# Altium PCB PCB1.PcbDoc
Units mm, origin at the board's own origin, x right, y up, seen from the top; angles counter-clockwise.
Board outline 106 x 133 mm, 2 copper layers (Top Layer, Bottom Layer); 52 components, 74 nets, 280 pads, 0 vias.
Unrouted connection lines stored in the file: 131.
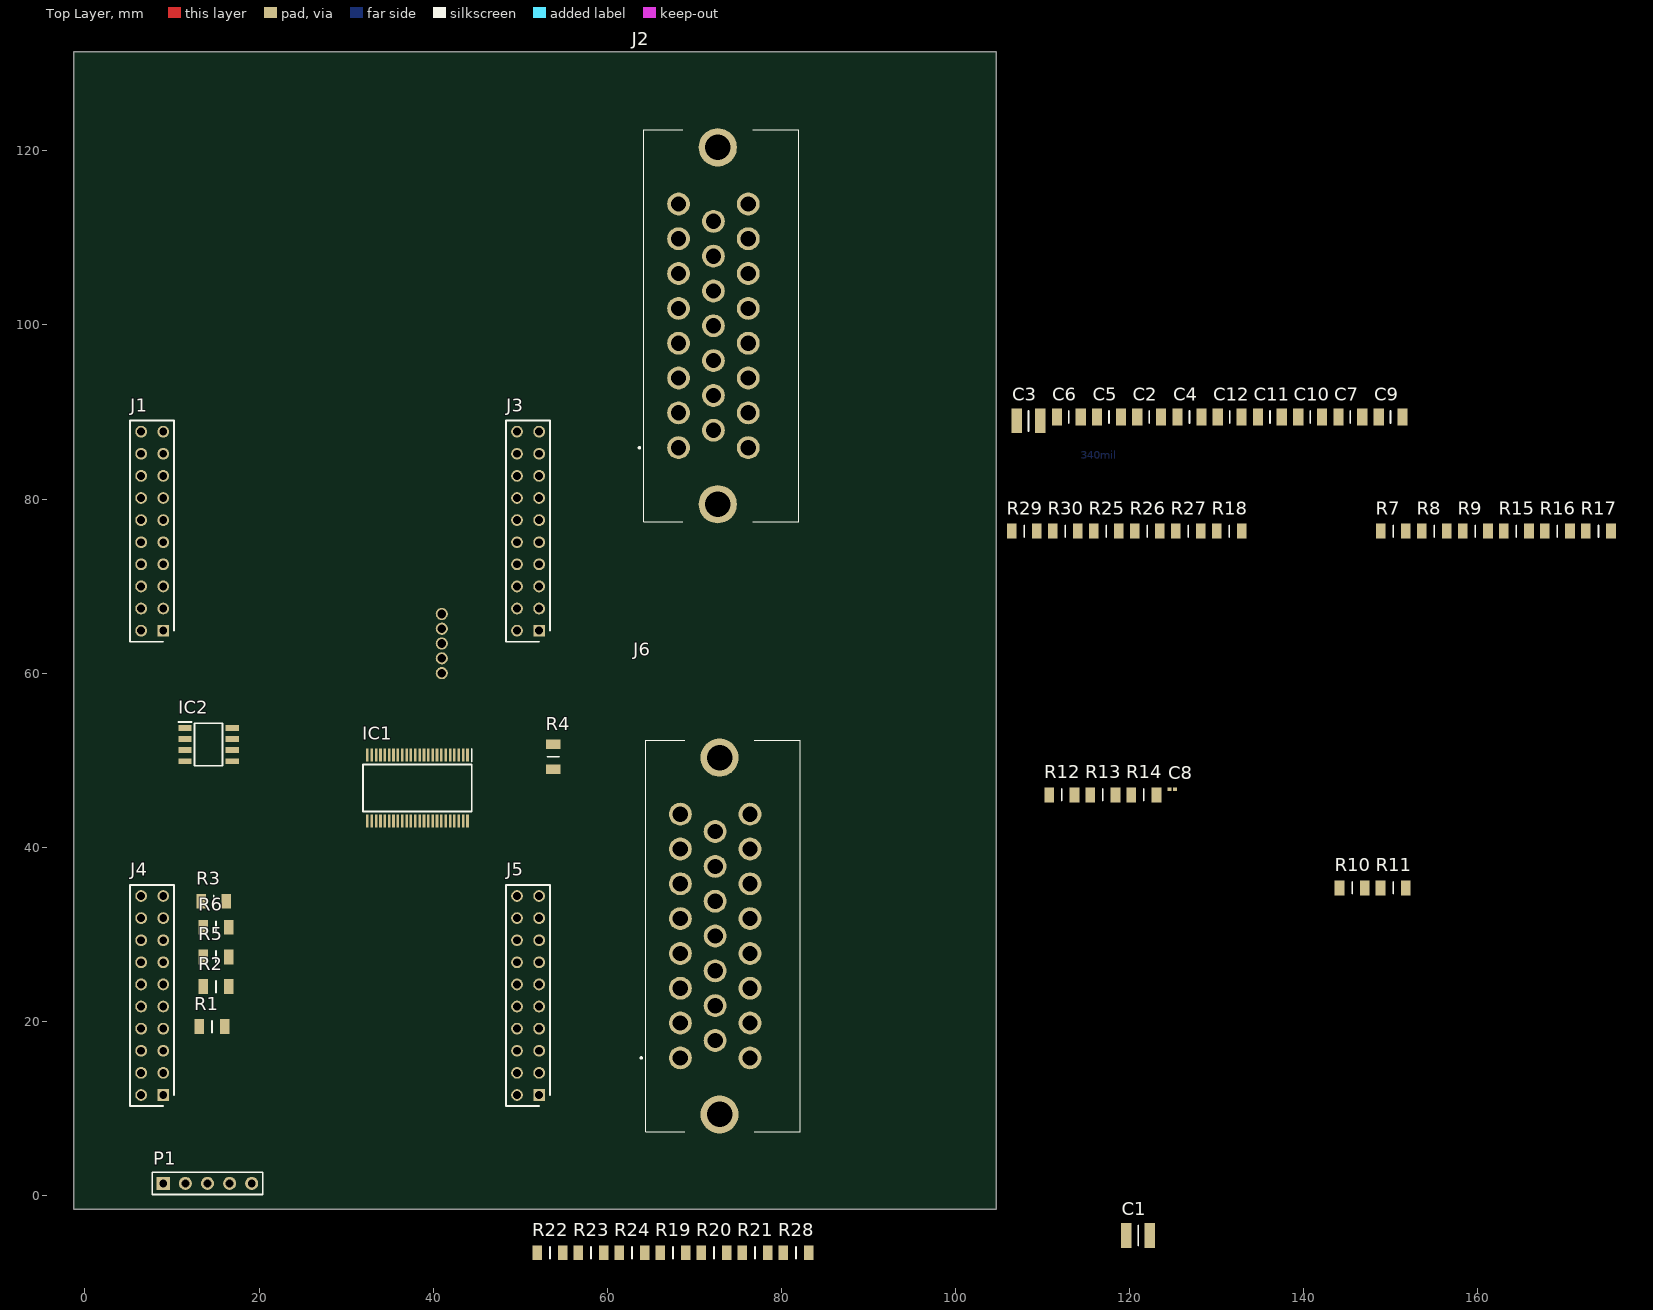
[diagram p0: Top Layer view]
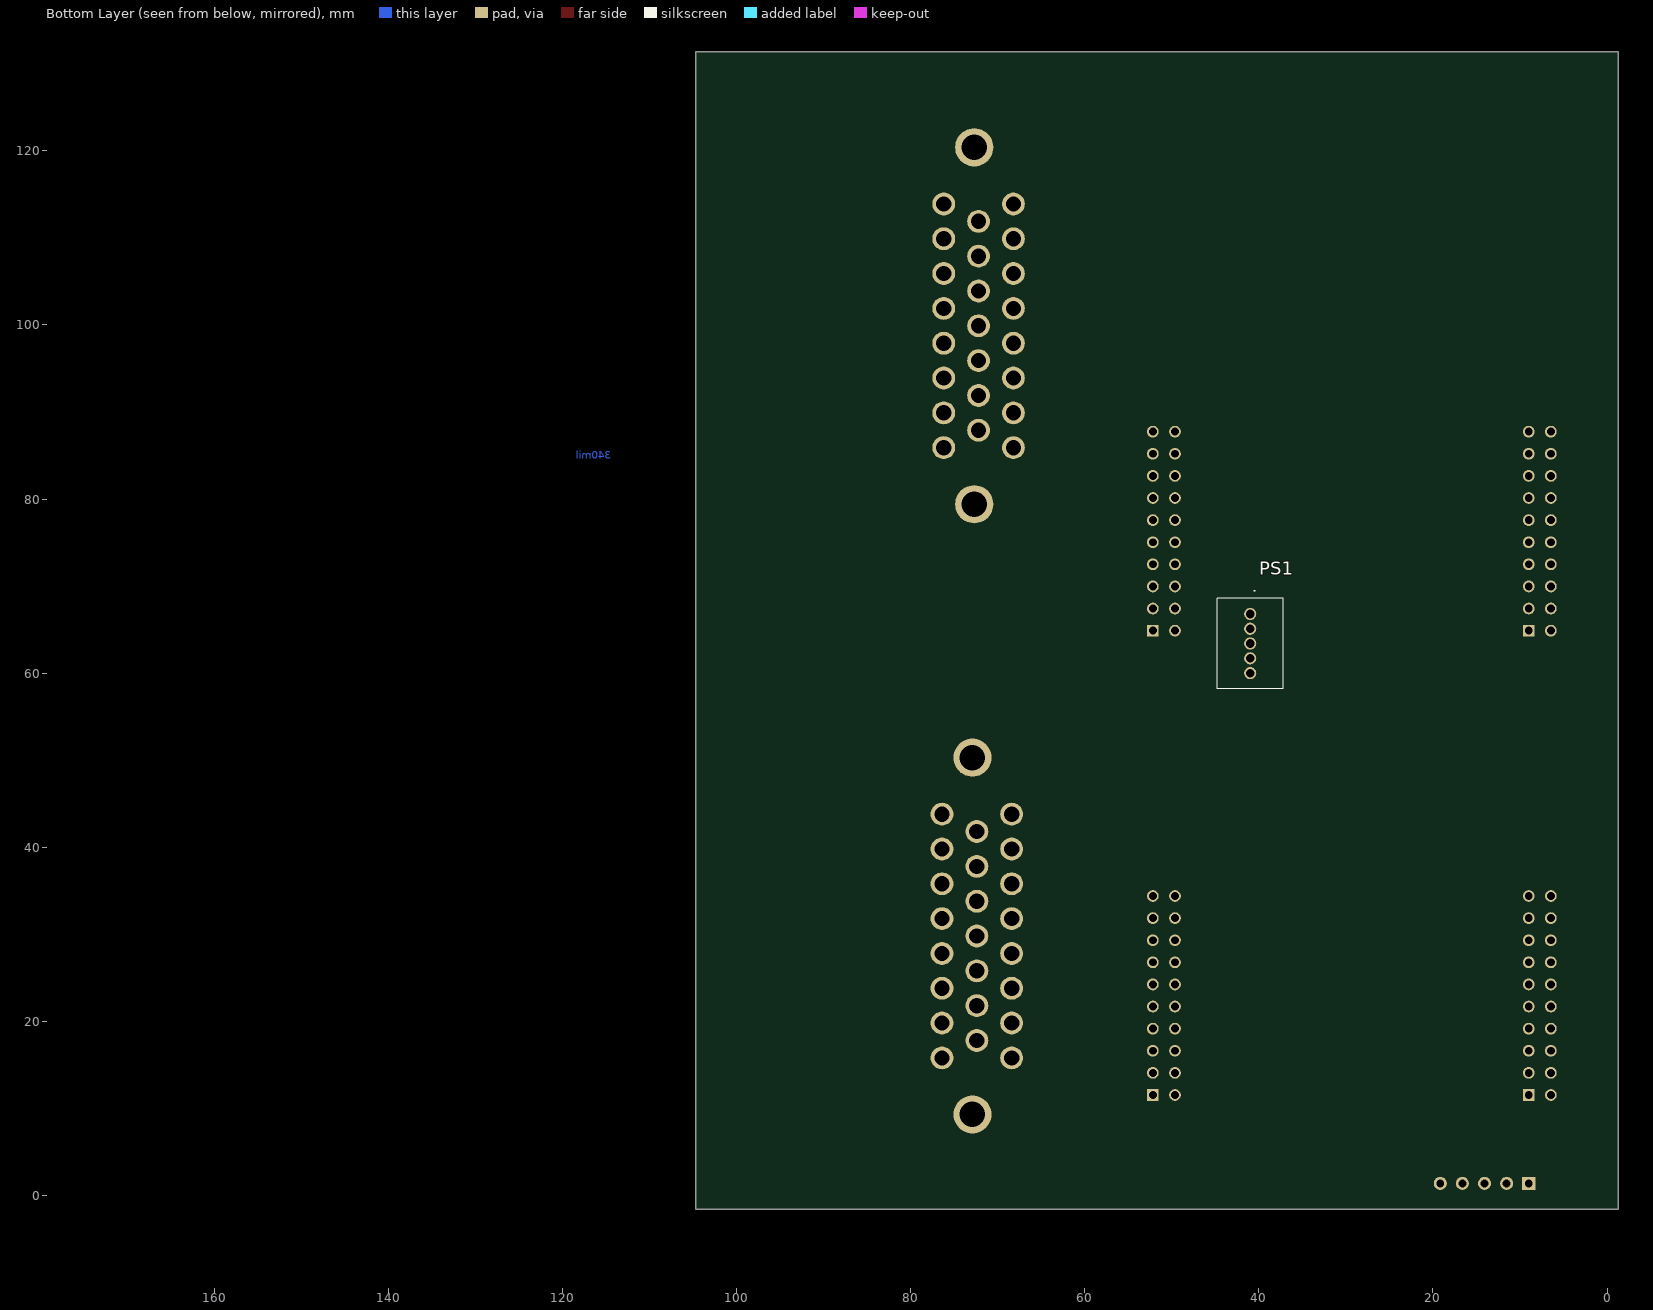
[diagram p1: Bottom Layer view, seen from below]

## Layer stack, top to bottom
Top Solder: solder mask 0.0102, Solder Resist, Dk 3.5
Top Layer: signal copper 0.0356
Dielectric 1: dielectric 0.32, FR-4, Dk 4.8
Bottom Layer: signal copper 0.0356
Bottom Solder: solder mask 0.0102, Solder Resist, Dk 3.5

## Board outline
-1.3,-1.6 104.7,-1.6 104.7,131.4 -1.3,131.4

## Design rules (kind name [scope] priority, off if disabled: settings)
Clearance [All] p1: gap=0.254 ignorepadtopadclearanceinfootprint=TRUE except(0: Arc-Hole Track-Hole SMDPad-Hole THPad-Hole Via-Hole Fill-Hole Poly-Hole Region-Hole Text-Hole; 0.203: Arc-Arc Arc-Track Arc-SMDPad Track-Track Track-SMDPad SMDPad-SMDPad)
PolygonConnect [All] p1: connectstyle=Relief reliefconductorwidth=0.254 reliefentries=4 polygonreliefangle="90 Angle" airgapwidth=0.254
RoomDefinition Sheet1 [InComponentClass('Sheet1')] p1: confinementstyle=ConfineIn formatcopy=TRUE lockcomponents=FALSE outline 250.3,-76.14 637.904,-76.14 637.904,-10.1 250.3,-10.1
RoutingVias [All] p1: holewidth=0.711 width=1.27 viastyle="Through Hole" minholewidth=0.711 minwidth=1.27 maxholewidth=0.711 maxwidth=1.27
SMDNeckDown [All] p1: percent=99.000
SolderMaskExpansion [All] p1: expansion=0.102
Width [All] p1: maxlimit=0.254 minlimit=0.254 preferedwidth=0.254
30 further rules are at their usual default settings.

## Classes and differential pairs
component class Sheet1: C2 C4 C5 C9 C11 IC2 J1 J3 J5 J6 P1 PS1 R1 R2 R3 R4 R5 R6 R7 R8 R9 R10 R11 R12 R13 R14 R15 R16 R17 R18 R19 R20 R21 R22 R23 R24 R25 R26 R27 R28 R29 R30

## Components (designator, comment, footprint, x,y, rotation, side; value= is the part's Value field where it differs from the comment)
C1 "C1210C107M4PAC7800" CAPC3225X280N 121,-4.6 r0 top
C2 "GMK316BJ106KL-T" CAPC3216X190N 122.264,89.422 r0 top
C3 "C1210C107M4PAC7800" CAPC3225X280N 108.401,88.972 r0 top
C4 "GMK316BJ106KL-T" CAPC3216X190N 126.886,89.422 r0 top
C5 "GMK316BJ106KL-T" CAPC3216X190N 117.643,89.422 r0 top
C6 "GMK316BJ106KL-T" CAPC3216X190N 113.022,89.422 r0 top
C7 "GMK316BJ106KL-T" CAPC3216X190N 145.37,89.422 r0 top
C8 "GRM0332C1E100JD01D" CAPC0603X33N 124.92,46.656 r0 top
C9 "GMK316BJ106KL-T" CAPC3216X190N 149.992,89.422 r0 top
C10 "GMK316BJ106KL-T" CAPC3216X190N 140.749,89.422 r0 top
C11 "GMK316BJ106KL-T" CAPC3216X190N 136.128,89.422 r0 top
C12 "GMK316BJ106KL-T" CAPC3216X190N 131.507,89.422 r0 top
IC1 "GTL2000DGG,118" SOP50P810X120-48N 38.2,46.8 r270 top
IC2 "MCP6022-E_SN" SOIC127P600X175-8N 14.2,51.8 r0 top
J1 "6-534206-0" 206-0 9,64.88 r90 top
J2 "776087-1" 7760871 68.2,85.9 r90 top
J3 "6-534206-0" 206-0_1 52.18,64.88 r90 top
J4 "6-534206-0" 206-0_2 9,11.54 r90 top
J5 "6-534206-0" 206-0_3 52.18,11.54 r90 top
J6 "776087-1" 7760871 68.4,15.8 r90 top
P1 "Header 5" HDR1X5 9,1.38 r0 top
PS1 "OKR-T_10-W12-C" OKRT10W12C 41,66.8 r90 bottom
R1 "6190" RESC3116X70N 14.6,19.4 r0 top
R2 "6190" RESC3116X70N 15.05,24 r0 top
R3 "6190" RESC3116X70N 14.8,33.8 r0 top
R4 "22000" RESC3116X70N 53.8,50.4 r270 top
R5 "6190" RESC3116X70N 15.05,27.4 r0 top
R6 "6190" RESC3116X70N 15.05,30.8 r0 top
R7 "9760" RESC3116X70N 150.305,76.324 r0 top
R8 "9760" RESC3116X70N 155.016,76.324 r0 top
R9 "9760" RESC3116X70N 159.728,76.324 r0 top
R10 "9760" RESC3116X70N 145.572,35.324 r0 top
R11 "9760" RESC3116X70N 150.283,35.324 r0 top
R12 "6800" RESC3116X70N 112.226,46.016 r0 top
R13 "200k" RESC3116X70N 116.937,46.016 r0 top
R14 "6800" RESC3116X70N 121.648,46.016 r0 top
R15 "9760" RESC3116X70N 164.439,76.324 r0 top
R16 "9760" RESC3116X70N 169.15,76.324 r0 top
R17 "9760" RESC3116X70N 173.861,76.324 r0 top
R18 "9760" RESC3116X70N 131.46,76.324 r0 top
R19 "9760" RESC3116X70N 67.56,-6.573 r0 top
R20 "432" RESC3116X70N 72.271,-6.573 r0 top
R21 "6190" RESC3116X70N 76.982,-6.573 r0 top
R22 "6190" RESC3116X70N 53.426,-6.573 r0 top
R23 "22000" RESC3116X70N 58.137,-6.573 r0 top
R24 "6190" RESC3116X70N 62.848,-6.573 r0 top
R25 "6190" RESC3116X70N 117.327,76.324 r0 top
R26 "6190" RESC3116X70N 122.038,76.324 r0 top
R27 "22000" RESC3116X70N 126.749,76.324 r0 top
R28 "22000" RESC3116X70N 81.693,-6.573 r0 top
R29 "22000" RESC3116X70N 107.904,76.324 r0 top
R30 "22000" RESC3116X70N 112.616,76.324 r0 top

## Footprints (in the part's own frame and the unit in brackets; to place one, negate y for a bottom-side part, rotate by r counter-clockwise, add the part's x,y. Pads: shape width x height; smd on the part's side, far side on the other; paste and mask are expansions set on the pad)
206-0 [mm]
  rect 1.35x1.35 hole 0.9: 1(0,0)
  round 1.35 hole 0.9: 2(2.54,0) 3(5.08,0) 4(7.62,0) 5(10.16,0) 6(12.7,0) 7(15.24,0) 8(17.78,0) 9(20.32,0) 10(22.86,0) 21(0,2.54) 22(2.54,2.54) 23(5.08,2.54) 24(7.62,2.54) 25(10.16,2.54) 26(12.7,2.54) 27(15.24,2.54) 28(17.78,2.54) 29(20.32,2.54) 30(22.86,2.54)
  silkscreen extent -1.27,-1.25 24.13,3.81, body extent -1.27,-1.24 24.13,3.78, height 8.64
206-0_1 [mm]
  round 1.35 hole 0.9: 11(22.86,2.54) 12(20.32,2.54) 13(17.78,2.54) 14(15.24,2.54) 15(12.7,2.54) 16(10.16,2.54) 17(7.62,2.54) 18(5.08,2.54) 19(2.54,2.54) 20(0,2.54) 31(22.86,0) 32(20.32,0) 33(17.78,0) 34(15.24,0) 35(12.7,0) 36(10.16,0) 37(7.62,0) 38(5.08,0) 39(2.54,0)
  rect 1.35x1.35 hole 0.9: 40(0,0)
  silkscreen extent -1.27,-1.25 24.13,3.81, body extent -1.27,-1.24 24.13,3.78, height 8.64
206-0_2 [mm]
  rect 1.35x1.35 hole 0.9: 41(0,0)
  round 1.35 hole 0.9: 42(2.54,0) 43(5.08,0) 44(7.62,0) 45(10.16,0) 46(12.7,0) 47(15.24,0) 48(17.78,0) 49(20.32,0) 50(22.86,0) 61(0,2.54) 62(2.54,2.54) 63(5.08,2.54) 64(7.62,2.54) 65(10.16,2.54) 66(12.7,2.54) 67(15.24,2.54) 68(17.78,2.54) 69(20.32,2.54) 70(22.86,2.54)
  silkscreen extent -1.27,-1.25 24.13,3.81, body extent -1.27,-1.24 24.13,3.78, height 0.05
206-0_3 [mm]
  round 1.35 hole 0.9: 51(22.86,2.54) 52(20.32,2.54) 53(17.78,2.54) 54(15.24,2.54) 55(12.7,2.54) 56(10.16,2.54) 57(7.62,2.54) 58(5.08,2.54) 59(2.54,2.54) 60(0,2.54) 71(22.86,0) 72(20.32,0) 73(17.78,0) 74(15.24,0) 75(12.7,0) 76(10.16,0) 77(7.62,0) 78(5.08,0) 79(2.54,0)
  rect 1.35x1.35 hole 0.9: 80(0,0)
  silkscreen extent -1.27,-1.25 24.13,3.81, body extent -1.27,-1.24 24.13,3.78, height 8.64
7760871 [mm]
  round 2.625 hole 1.75: 1(0,0) 2(4,0) 3(8,0) 4(12,0) 5(16,0) 6(20,0) 7(24,0) 8(28,0) 9(2,-4) 10(6,-4) 11(10,-4) 12(14,-4) 13(18,-4) 14(22,-4) 15(26,-4) 16(0,-8) 17(4,-8) 18(8,-8) 19(12,-8) 20(16,-8) 21(20,-8) 22(24,-8) 23(28,-8)
  round 4.395 hole 2.93: MH1(-6.5,-4.5) MH2(34.5,-4.5)
  silkscreen extent -8.5,-13.8 36.5,4.6, body extent -16.43,-35.77 44.37,2.03, height 27.99
CAPC0603X33N [mm]
  rect 0.46x0.42 smd: 1(-0.33,0) 2(0.33,0)
  body extent -0.3,-0.15 0.3,0.15, height 0.33
CAPC3216X190N [mm]
  rect 1.17x1.92 smd: 1(-1.37,0) 2(1.37,0)
  silkscreen extent 0,-0.7 0,0.7, body extent -1.6,-0.8 1.6,0.8, height 1.9
CAPC3225X280N [mm]
  rect 1.21x2.82 smd: 1(-1.35,0) 2(1.35,0)
  silkscreen extent 0,-1.15 0,1.15, body extent -1.6,-1.25 1.6,1.25, height 2.8
HDR1X5 [mm] "Connector; Header; 5 Position"
  rect 1.5x1.5 hole 0.9: 1(0,0)
  round 1.5 hole 0.9: 2(2.54,0) 3(5.08,0) 4(7.62,0) 5(10.16,0)
  silkscreen extent -1.27,-1.27 11.43,1.27
OKRT10W12C [mm]
  round 1.4 hole 1.006: 1(0,0) 2(-1.7,0) 3(-3.4,0) 4(-5.1,0) 5(-6.8,0)
  silkscreen extent -8.6,-3.82 2.7,3.8, body extent -8.6,-3.82 1.8,3.8, height 16.55
RESC3116X70N [mm]
  rect 1.1x1.7 smd: 1(-1.45,0) 2(1.45,0)
  silkscreen extent 0,-0.67 0,0.67, body extent -1.56,-0.77 1.56,0.77, height 0.7
SOIC127P600X175-8N [mm]
  rect 1.525x0.65 smd: 1(-2.712,1.905) 2(-2.712,0.635) 3(-2.712,-0.635) 4(-2.712,-1.905) 5(2.712,-1.905) 6(2.712,-0.635) 7(2.712,0.635) 8(2.712,1.905)
  silkscreen extent -3.47,-2.45 1.6,2.58, body extent -3,-2.45 3,2.45, height 1.75
SOP50P810X120-48N [mm]
  rect 1.475x0.3 smd: 1(-3.788,5.75) 2(-3.788,5.25) 3(-3.788,4.75) 4(-3.788,4.25) 5(-3.788,3.75) 6(-3.788,3.25) 7(-3.788,2.75) 8(-3.788,2.25) 9(-3.788,1.75) 10(-3.788,1.25) 11(-3.788,0.75) 12(-3.788,0.25) 13(-3.788,-0.25) 14(-3.788,-0.75) 15(-3.788,-1.25) 16(-3.788,-1.75) 17(-3.788,-2.25) 18(-3.788,-2.75) 19(-3.788,-3.25) 20(-3.788,-3.75) 21(-3.788,-4.25) 22(-3.788,-4.75) 23(-3.788,-5.25) 24(-3.788,-5.75) 25(3.788,-5.75) 26(3.788,-5.25) 27(3.788,-4.75) 28(3.788,-4.25) 29(3.788,-3.75) 30(3.788,-3.25) 31(3.788,-2.75) 32(3.788,-2.25) 33(3.788,-1.75) 34(3.788,-1.25) 35(3.788,-0.75) 36(3.788,-0.25) 37(3.788,0.25) 38(3.788,0.75) 39(3.788,1.25) 40(3.788,1.75) 41(3.788,2.25) 42(3.788,2.75) 43(3.788,3.25) 44(3.788,3.75) 45(3.788,4.25) 46(3.788,4.75) 47(3.788,5.25) 48(3.788,5.75)
  silkscreen extent -4.52,-6.25 2.7,6.25, body extent -4.05,-6.25 4.05,6.25, height 1.2

## Part data
C1 C3: "Capacitor", Manufacturer_Name=Kemet, Mouser Part Number=N/A, Datasheet Link=https://content.kemet.com/datasheets/KEM_C1006_X5R_SMD.pdf, Height=2.8mm, Manufacturer_Part_Number=C1210C107M4PAC7800, Mouser Price/Stock=https://www.mouser.com/Search/Refine.aspx?Keyword=N%2FA
C2 C4 C5 C6 C7 C9 C10 C11 C12: "Capacitor", Manufacturer_Name="TAIYO YUDEN", Mouser Part Number=963-GMK316BJ106KL-T, Datasheet Link=https://www.yuden.co.jp/productdata/catalog/en/mlcc_all_e.pdf, Height=1.9mm, Manufacturer_Part_Number=GMK316BJ106KL-T, Mouser Price/Stock=http://www.mouser.com/Search/ProductDetail.aspx?qs=I6KAKw0tg2wzwIZ%2fJjJ5Xg%3d%3d
C8: "Capacitor", Manufacturer_Name="Murata Electronics", Mouser Part Number=81-GRM0332C1E100JD01, Datasheet Link=http://www.murata.com/~/media/webrenewal/support/library/catalog/products/capacitor/mlcc/c02e.pdf, Height=0.33mm, Manufacturer_Part_Number=GRM0332C1E100JD01D, Mouser Price/Stock=https://www.mouser.com/Search/Refine.aspx?Keyword=81-GRM0332C1E100JD01
IC1: "Integrated Circuit", Manufacturer_Name=Nexperia, Mouser Part Number=771-GTL2000DGG118, Datasheet Link=https://www.nxp.com/docs/en/data-sheet/GTL2000.pdf, Height=1.2mm, Manufacturer_Part_Number=GTL2000DGG,118, Mouser Price/Stock=https://www.mouser.com/Search/Refine.aspx?Keyword=771-GTL2000DGG118
IC2: "Integrated Circuit", Manufacturer_Name=Microchip, Manufacturer_Part_Number=MCP6022-E/SN, Mouser Part Number=579-MCP6022-E/SN, RS Part Number=2508396144, Allied_Number=70046166, Allied Price/Stock=http://www.alliedelec.com/microchip-technology-inc-mcp6022-e-sn/70046166/, Datasheet Link=http://ww1.microchip.com/downloads/en/DeviceDoc/21685d.pdf, Height=1.75mm, Mouser Price/Stock=https://www.mouser.com/Search/Refine.aspx?Keyword=579-MCP6022-E%2FSN, RS Price/Stock=http://uk.rs-online.com/web/p/products/2508396144
J1: "Connector", Manufacturer_Name="TE Connectivity", Mouser Part Number=571-6-534206-0, RS Part Number=6803445P, Allied_Number=70042958, Allied Price/Stock=https://www.alliedelec.com/teconnectivity-6-534206-0/70042958/, Datasheet Link=https://www.te.com/commerce/DocumentDelivery/DDEController?Action=showdoc&DocId=Customer+Drawing%7F534206%7FR7%7Fpdf%7FEnglish%7FENG_CD_534206_R7.pdf%7F6-534206-0, Height=8.64mm, Manufacturer_Part_Number=6-534206-0, Mouser Price/Stock=https://www.mouser.com/Search/Refine.aspx?Keyword=571-6-534206-0, RS Price/Stock=http://uk.rs-online.com/web/p/products/6803445P
J2 J6: "Connector", Manufacturer_Name="TE Connectivity", Mouser Part Number=571-776087-1, RS Part Number=7181471P, Allied_Number=70288175, Allied Price/Stock=https://www.alliedelec.com/te-connectivity-776087-1/70288175/, Datasheet Link=https://componentsearchengine.com/Datasheets/1/776087-1.pdf, Height=32.1mm, Manufacturer_Part_Number=776087-1, Mouser Price/Stock=https://www.mouser.com/Search/Refine.aspx?Keyword=571-776087-1, RS Price/Stock=http://uk.rs-online.com/web/p/products/7181471P
J3: library part 6-534206-0_1, "Connector", Manufacturer_Name="TE Connectivity", Mouser Part Number=571-6-534206-0, RS Part Number=6803445P, Allied_Number=70042958, Allied Price/Stock=https://www.alliedelec.com/teconnectivity-6-534206-0/70042958/, Datasheet Link=https://www.te.com/commerce/DocumentDelivery/DDEController?Action=showdoc&DocId=Customer+Drawing%7F534206%7FR7%7Fpdf%7FEnglish%7FENG_CD_534206_R7.pdf%7F6-534206-0, Height=8.64mm, Manufacturer_Part_Number=6-534206-0, Mouser Price/Stock=https://www.mouser.com/Search/Refine.aspx?Keyword=571-6-534206-0, RS Price/Stock=http://uk.rs-online.com/web/p/products/6803445P
J4: library part 6-534206-0_2, "Connector", Manufacturer_Name="TE Connectivity", Mouser Part Number=571-6-534206-0, RS Part Number=6803445P, Allied_Number=70042958, Allied Price/Stock=https://www.alliedelec.com/teconnectivity-6-534206-0/70042958/, Datasheet Link=https://www.te.com/commerce/DocumentDelivery/DDEController?Action=showdoc&DocId=Customer+Drawing%7F534206%7FR7%7Fpdf%7FEnglish%7FENG_CD_534206_R7.pdf%7F6-534206-0, Height=8.64mm, Manufacturer_Part_Number=6-534206-0, Mouser Price/Stock=https://www.mouser.com/Search/Refine.aspx?Keyword=571-6-534206-0, RS Price/Stock=http://uk.rs-online.com/web/p/products/6803445P
J5: library part 6-534206-0_3, "Connector", Manufacturer_Name="TE Connectivity", Mouser Part Number=571-6-534206-0, RS Part Number=6803445P, Allied_Number=70042958, Allied Price/Stock=https://www.alliedelec.com/teconnectivity-6-534206-0/70042958/, Datasheet Link=https://www.te.com/commerce/DocumentDelivery/DDEController?Action=showdoc&DocId=Customer+Drawing%7F534206%7FR7%7Fpdf%7FEnglish%7FENG_CD_534206_R7.pdf%7F6-534206-0, Height=8.64mm, Manufacturer_Part_Number=6-534206-0, Mouser Price/Stock=https://www.mouser.com/Search/Refine.aspx?Keyword=571-6-534206-0, RS Price/Stock=http://uk.rs-online.com/web/p/products/6803445P
P1: "Header, 5-Pin", LatestRevisionDate=17-Jul-2002, LatestRevisionNote="Re-released for DXP Platform.", Publisher="Altium Limited"
PS1: "Power Supply", Manufacturer_Name="Murata Electronics", Manufacturer_Part_Number=OKR-T/10-W12-C, Mouser Part Number=580-OKR-T/10-W12-C, RS Part Number=1736947P, Datasheet Link=https://componentsearchengine.com/Datasheets/2/OKR-T_10-W12-C.pdf, Height=16.55mm, Mouser Price/Stock=https://www.mouser.com/Search/Refine.aspx?Keyword=580-OKR-T%2F10-W12-C, RS Price/Stock=http://uk.rs-online.com/web/p/products/1736947P
R1 R2 R3 R5 R6 R21 R22 R24 R25 R26: library part ERJ-8ENF1000V, "Resistor", Manufacturer_Name=Panasonic, Manufacturer_Part_Number=ERJ-8ENF6191V, Mouser Part Number=667-ERJ-8ENF6191V, Allied_Number=70266166, Allied Price/Stock=https://www.alliedelec.com/panasonic-erj-8enf1000v/70266166/, Datasheet Link=https://industrial.panasonic.com/cdbs/www-data/pdf/RDA0000/AOA0000C86.pdf, Height=0.7mm, Mouser Price/Stock=https://www.mouser.com/Search/Refine.aspx?Keyword=667-ERJ-8ENF1000V
R4 R23 R27 R28 R29 R30: library part ERJ-8ENF1000V, "Resistor", Manufacturer_Name=Panasonic, Manufacturer_Part_Number=ERJ-8ENF2201V, Mouser Part Number=667-ERJ-8ENF2201V, Allied_Number=70266166, Allied Price/Stock=https://www.alliedelec.com/panasonic-erj-8enf1000v/70266166/, Datasheet Link=https://industrial.panasonic.com/cdbs/www-data/pdf/RDA0000/AOA0000C86.pdf, Height=0.7mm, Mouser Price/Stock=https://www.mouser.com/Search/Refine.aspx?Keyword=667-ERJ-8ENF1000V
R7 R8 R9 R10 R11 R15 R16 R17 R18 R19: library part ERJ-8ENF1000V, "Resistor", Manufacturer_Name=Panasonic, Manufacturer_Part_Number=ERJ-8ENF9761V, Mouser Part Number=667-ERJ-8ENF9761V, Allied_Number=70266166, Allied Price/Stock=https://www.alliedelec.com/panasonic-erj-8enf1000v/70266166/, Datasheet Link=https://industrial.panasonic.com/cdbs/www-data/pdf/RDA0000/AOA0000C86.pdf, Height=0.7mm, Mouser Price/Stock=https://www.mouser.com/Search/Refine.aspx?Keyword=667-ERJ-8ENF1000V
R12 R14: library part ERJ-8ENF1000V, "Resistor", Manufacturer_Name=Panasonic, Manufacturer_Part_Number=ERJ-8ENF6801V, Mouser Part Number=667-ERJ-8ENF6801V, Allied_Number=70266166, Allied Price/Stock=https://www.alliedelec.com/panasonic-erj-8enf1000v/70266166/, Datasheet Link=https://industrial.panasonic.com/cdbs/www-data/pdf/RDA0000/AOA0000C86.pdf, Height=0.7mm, Mouser Price/Stock=https://www.mouser.com/Search/Refine.aspx?Keyword=667-ERJ-8ENF1000V
R13: library part ERJ-8ENF1000V, "Resistor", Manufacturer_Name=Panasonic, Manufacturer_Part_Number=ERJ-8ENF2003V, Mouser Part Number=667-ERJ-8ENF2003V, Allied_Number=70266166, Allied Price/Stock=https://www.alliedelec.com/panasonic-erj-8enf1000v/70266166/, Datasheet Link=https://industrial.panasonic.com/cdbs/www-data/pdf/RDA0000/AOA0000C86.pdf, Height=0.7mm, Mouser Price/Stock=https://www.mouser.com/Search/Refine.aspx?Keyword=667-ERJ-8ENF1000V
R20: library part ERJ-8ENF1000V, "Resistor", Manufacturer_Name=Panasonic, Manufacturer_Part_Number=ERJ-8ENF4320V, Mouser Part Number=667-ERJ-8ENF4320V, Allied_Number=70266166, Allied Price/Stock=https://www.alliedelec.com/panasonic-erj-8enf1000v/70266166/, Datasheet Link=https://industrial.panasonic.com/cdbs/www-data/pdf/RDA0000/AOA0000C86.pdf, Height=0.7mm, Mouser Price/Stock=https://www.mouser.com/Search/Refine.aspx?Keyword=667-ERJ-8ENF1000V

## Nets (pads, with @x,y where several pads share a name; then routed paths per layer and width w, separated by ;. In a path a pad name is that pad's centre, name@x,y a point inside that pad or via, vN(x,y) a via of type N, cw(c..) or ccw(c..) an arc to the next point about the centre after c; other vN are vias at no path point)
+3V3: C9.2 C10.2 C11.2 C12.2 IC1.2 J1.1 J4.41 PS1.4
+5V: C4.2 C5.2 C6.2 C7.2 IC2.8 J1.21 J4.61 P1.1 R13.2
+12V: C2.2 PS1.2
+12V_car: C1.1 J2.15 J6.15
APS1: J6.22 R22.2
APS1VD: J1.28 R16.1 R22.1
APS2: J6.23 R24.2
APS2VD: J1.25 R17.1 R24.1
CAN-H: J2.9 P1.5
CAN-L: J2.8 P1.4
CPBRB: J2.3 R4.1
CPBRBVD: J5.80 R4.2 R12.2
EBOOST: J2.7 J3.33
ENA: IC1.6 J3.17
ENB: IC1.7 J3.15
FBP: J6.20 R6.2
FBPVD: J4.68 R6.1 R7.2
FLST: J6.19 R5.2
FLSTVD: J4.66 R5.1 R8.2
FLWE: IC1.8 J3.39
FRST: J6.17 R2.2
FRSTVD: J4.67 R2.1 R10.2
FRWE: IC1.9 J3.38
GND: C1.2 C2.1 C4.1 C5.1 C6.1 C7.1 C8.1 C9.1 C10.1 C11.1 C12.1 IC1.1 IC2.4 J1.22 J2.14 J3.20 J4.62 J5.60 J6.14 P1.3 PS1.3 R7.1 R8.1 R9.1 R10.1 R11.1 R12.1 R14.2 R15.2 R16.2 R17.2 R18.2 R19.2 R20.2 R29.2 R30.2
I2CSCL: J4.49
I2CSDA: J4.50
INA: IC1.4 J3.19
INB: IC1.5 J3.18
MDSG: IC2.5 J1.30
MDSG_OUT: IC2.7 J2.2 R28.1
MDSW: IC1.12 J4.45
MRSG: IC2.3 J4.70
MRSG_OUT: IC2.1 J2.1 R27.1
MRSW: IC1.13 J4.46
NetC8_2: C8.2 IC1.47 IC1.48 R13.1
NetIC1_36: IC1.36 J6.11
NetIC1_37: IC1.37 J6.10
NetIC1_38: IC1.38 J6.9
NetIC1_39: IC1.39 J6.8
NetIC1_40: IC1.40 J6.7
NetIC1_41: IC1.41 J6.6
NetIC1_42: IC1.42 J6.5
NetIC1_43: IC1.43 J6.4
NetIC1_44: IC1.44 J6.3
NetIC1_45: IC1.45 J6.2
NetIC1_46: IC1.46 J6.1
NetIC2_2: IC2.2 R27.2 R29.1
NetIC2_6: IC2.6 R28.2 R30.1
NetPS1_5: PS1.5 R20.1
RBP: J6.21 R21.2
RBPVD: J4.65 R15.1 R21.1
RLST: J6.18 R3.2
RLSTVD: J4.69 R3.1 R9.2
RLWE: IC1.10 J3.36
RRST: J6.16 R1.2
RRSTVD: J4.64 R1.1 R11.2
RRWE: IC1.11 J3.37
RST: J3.16 J5.56
SHDW: J2.6 J3.34
SHUP: J2.5 J3.35
SPICD: J5.53
SPICLK: J4.47
SPICS: J5.52
SPIMISO: J5.54
SPIMOSI: J5.55
TPS1: J6.12 R25.2
TPS1VD: J1.29 R18.1 R25.1
TPS2: J6.13 R26.2
TPS2VP: J1.26 R19.1 R26.1
TPWM: IC1.3 J3.40
TSMS: J2.4 R23.2
TSMSVD: J5.79 R14.1 R23.1
UARTRX: J4.43
UARTTX: J4.44
pads on no net: C3.1 C3.2 IC1.14 IC1.15 IC1.16 IC1.17 IC1.18 IC1.19 IC1.20 IC1.21 IC1.22 IC1.23 IC1.24 IC1.25 IC1.26 IC1.27 IC1.28 IC1.29 IC1.30 IC1.31 IC1.32 IC1.33 IC1.34 IC1.35 J1.2 J1.3 J1.4 J1.5 J1.6 J1.7 J1.8 J1.9 J1.10 J1.23 J1.24 J1.27 J2.10 J2.11 J2.12 J2.13 J2.16 J2.17 J2.18 J2.19 J2.20 J2.21 J2.22 J2.23 J2.MH1 J2.MH2 J3.11 J3.12 J3.13 J3.14 J3.31 J3.32 J4.42 J4.48 J4.63 J5.51 J5.57 J5.58 J5.59 J5.71 J5.72 J5.73 J5.74 J5.75 J5.76 J5.77 J5.78 J6.MH1 J6.MH2 P1.2 PS1.1

## Polygon pours and split planes (outlines as drawn)
no net on Mechanical 1 (solid): 134.7,193.3
no net on Mechanical 1 "Board outline" (none): 0.08,-0.02 58.48,-0.02 58.48,129.78 0.08,129.78

## Other copper
Bottom Layer:
  text "340mil" at 114.4,84.3 h1.52